# Altium PCB pcb.PcbDoc (part 1 of 2)
Units mm, origin at the board's own origin, x right, y up, seen from the top; angles counter-clockwise.
Board outline 90 x 60 mm, 2 copper layers (Top Layer, Bottom Layer); 136 components, 131 nets, 518 pads, 124 vias.
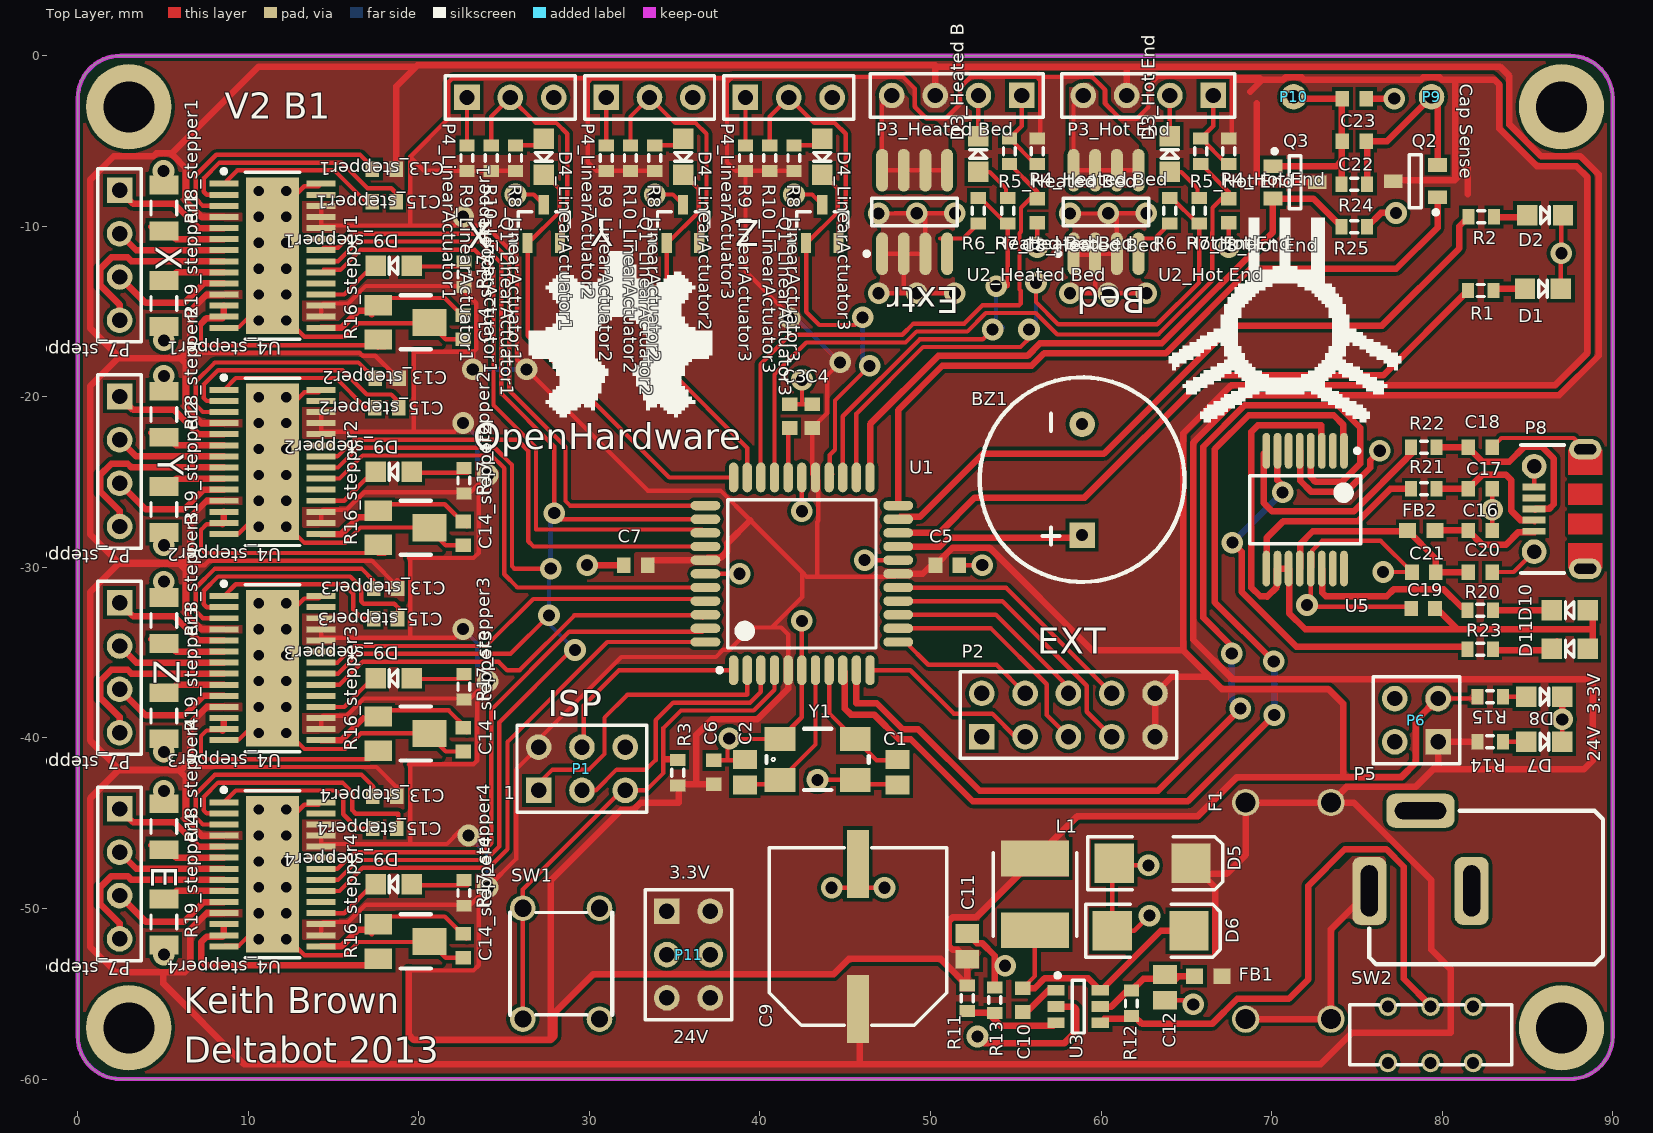
[diagram p0: Top Layer view]
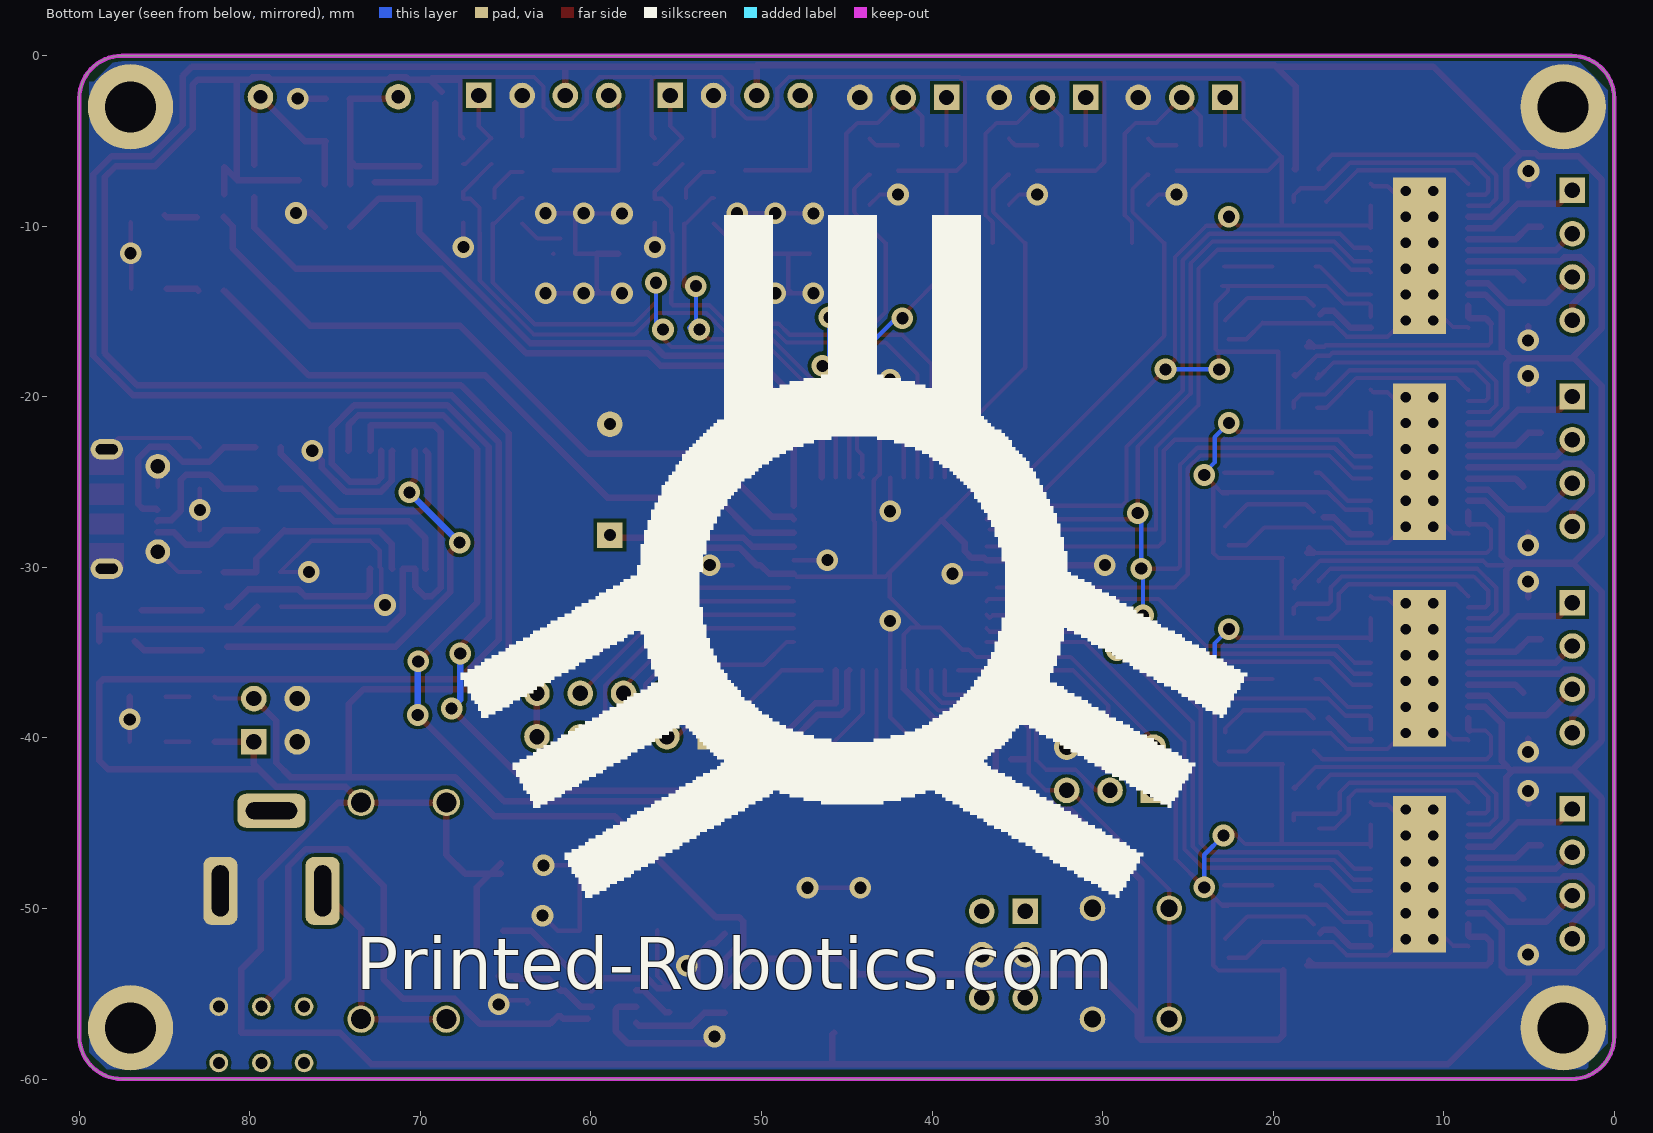
[diagram p1: Bottom Layer view, seen from below]

## Layer stack, top to bottom
Top Layer: signal copper 0.0356
Dielectric: dielectric 0.32, FR-4, Dk 4.8
Bottom Layer: signal copper 0.0356

## Board outline
0,-57.5 0,-2.5 cw(c2.5,-2.5) 2.5,0 87.5,0 cw(c87.5,-2.5) 90,-2.5 90,-57.5 cw(c87.5,-57.5) 87.5,-60 2.5,-60 cw(c2.5,-57.5)

## Design rules (kind name [scope] priority, off if disabled: settings)
Clearance [All] p1: gap=0.203
MinimumSolderMaskSliver [All] p1: minsoldermaskwidth=0
PolygonConnect [All] p1: connectstyle=Direct reliefconductorwidth=0.5 reliefentries=4 polygonreliefangle="90 Angle" airgapwidth=0.254
RoomDefinition "Cap Sense" [InComponentClass('Cap Sense')] p1: confinementstyle=ConfineIn formatcopy=TRUE lockcomponents=FALSE outline 68.275,-15.037 81.483,-15.037 81.483,-0.445 68.275,-0.445
RoomDefinition Power [InComponentClass('Power')] p2: confinementstyle=ConfineIn formatcopy=TRUE lockcomponents=FALSE outline 32.766,-62.23 90.957,-62.23 90.957,-35.763 32.766,-35.763
RoomDefinition USB_Comms [InComponentClass('USB_Comms')] p3: confinementstyle=ConfineIn formatcopy=TRUE lockcomponents=FALSE outline 63.501,-19.439 63.501,-35.738 90.324,-35.738 90.324,-19.439
RoomDefinition stepper4 [InComponentClass('stepper4')] p4: confinementstyle=ConfineIn formatcopy=TRUE lockcomponents=FALSE outline 25.035,-53.939 25.035,-41.849 0.346,-41.849 0.346,-53.939
RoomDefinition stepper3 [InComponentClass('stepper3')] p5: confinementstyle=ConfineIn formatcopy=TRUE lockcomponents=FALSE outline 25.035,-41.849 25.035,-29.759 0.346,-29.759 0.346,-41.849
RoomDefinition stepper2 [InComponentClass('stepper2')] p6: confinementstyle=ConfineIn formatcopy=TRUE lockcomponents=FALSE outline 25.035,-29.759 25.035,-17.668 0.346,-17.668 0.346,-29.759
RoomDefinition stepper1 [InComponentClass('stepper1')] p7: confinementstyle=ConfineIn formatcopy=TRUE lockcomponents=FALSE outline 25.035,-17.668 25.035,-5.578 0.346,-5.578 0.346,-17.668
RoomDefinition LinearActuator3 [InComponentClass('LinearActuator3')] p8: confinementstyle=ConfineIn formatcopy=TRUE lockcomponents=FALSE outline 37.628,-0.922 37.628,-12.497 45.791,-12.497 45.791,-0.922
RoomDefinition LinearActuator2 [InComponentClass('LinearActuator2')] p9: confinementstyle=ConfineIn formatcopy=TRUE lockcomponents=FALSE outline 29.464,-0.922 29.464,-12.497 37.628,-12.497 37.628,-0.922
RoomDefinition LinearActuator1 [InComponentClass('LinearActuator1')] p10: confinementstyle=ConfineIn formatcopy=TRUE lockcomponents=FALSE outline 21.3,-0.922 21.3,-12.497 29.464,-12.497 29.464,-0.922
RoomDefinition "Hot End" [InComponentClass('Hot End')] p11: confinementstyle=ConfineIn formatcopy=TRUE lockcomponents=FALSE outline 57.018,-14.739 68.245,-14.739 68.245,-0.922 57.018,-0.922
RoomDefinition "Heated Bed" [InComponentClass('Heated Bed')] p12: confinementstyle=ConfineIn formatcopy=TRUE lockcomponents=FALSE outline 45.791,-14.739 57.018,-14.739 57.018,-0.922 45.791,-0.922
RoomDefinition CPU [InComponentClass('CPU')] p13: confinementstyle=ConfineIn formatcopy=TRUE lockcomponents=FALSE outline 90,-59.842 90,0 22.595,0 22.595,-59.842
RoutingVias [All] p1: holewidth=0.711 width=1.27 viastyle="Through Hole" minholewidth=0.711 minwidth=1.27 maxholewidth=0.711 maxwidth=1.27
SilkToSilkClearance [All] p1: silktosilkclearance=0
SilkToSolderMaskClearance [IsPad] p1: minsilkscreentomaskgap=0 clearancetoexposedcopper=TRUE
SolderMaskExpansion [All] p1: expansion=0.102
Width [All] p1: maxlimit=1.27 minlimit=0.203 preferedwidth=0.381
25 further rules are at their usual default settings.

## Classes and differential pairs
channel class Stepper_driver: stepper1 stepper2 stepper3 stepper4
channel class Linear_actuator: LinearActuator1 LinearActuator2 LinearActuator3
channel class heater: "Heated Bed" "Hot End"
net class STOP[1..3]: STOP1 STOP2 STOP3
net class STEP[1..3]: STEP1 STEP2 STEP3
net class DIR[1..3]: DIR1 DIR2 DIR3
component class USB_Comms: C16 C17 C18 C19 C20 C21 D10 D11 FB2 P8 R20 R21 R22 R23 U5
component class stepper4: C13_stepper4 C14_stepper4 C15_stepper4 D9_stepper4 P7_stepper4 R16_stepper4 R17_stepper4 R18_stepper4 R19_stepper4 U4_stepper4
component class stepper3: C13_stepper3 C14_stepper3 C15_stepper3 D9_stepper3 P7_stepper3 R16_stepper3 R17_stepper3 R18_stepper3 R19_stepper3 U4_stepper3
component class stepper2: C13_stepper2 C14_stepper2 C15_stepper2 D9_stepper2 P7_stepper2 R16_stepper2 R17_stepper2 R18_stepper2 R19_stepper2 U4_stepper2
component class stepper1: C13_stepper1 C14_stepper1 C15_stepper1 D9_stepper1 P7_stepper1 R16_stepper1 R17_stepper1 R18_stepper1 R19_stepper1 U4_stepper1
component class Power: C9 C10 C11 C12 D5 D6 D7 D8 F1 FB1 L1 P5 P6 P11 R11 R12 R13 R14 R15 SW2 U3
component class LinearActuator3: D4_LinearActuator3 P4_LinearActuator3 Q1_LinearActuator3 R8_LinearActuator3 R9_LinearActuator3 R10_LinearActuator3
component class LinearActuator2: D4_LinearActuator2 P4_LinearActuator2 Q1_LinearActuator2 R8_LinearActuator2 R9_LinearActuator2 R10_LinearActuator2
component class LinearActuator1: D4_LinearActuator1 P4_LinearActuator1 Q1_LinearActuator1 R8_LinearActuator1 R9_LinearActuator1 R10_LinearActuator1
component class "Hot End": "C8_Hot End" "D3_Hot End" "P3_Hot End" "R4_Hot End" "R5_Hot End" "R6_Hot End" "R7_Hot End" "U2_Hot End"
component class "Heated Bed": "C8_Heated Bed" "D3_Heated Bed" "P3_Heated Bed" "R4_Heated Bed" "R5_Heated Bed" "R6_Heated Bed" "R7_Heated Bed" "U2_Heated Bed"
component class CPU: BZ1 C1 C2 C3 C4 C5 C6 C7 D1 D2 P1 P2 R1 R2 SW1 U1 Y1
component class "Cap Sense": C22 C23 P9 P10 Q2 Q3 R24 R25

## Components (designator, comment, footprint, x,y, rotation, side; value= is the part's Value field where it differs from the comment)
BZ1 "Buzzer" buzzer 58.903,-24.867 r90 top
C1 "Cap" CAPC2012L-3D 48.057,-42.012 r90 top
C2 "Cap" CAPC2012L-3D 39.116,-42.012 r270 top
C3 "Cap" 1608[0603] 41.746,-21.133 r270 top
C4 "Cap" 1608[0603] 43.067,-21.133 r90 top
C5 "Cap" 1608[0603] 50.992,-29.87 r0 top
C6 "Cap" 1608[0603] 37.287,-42.012 r90 top
C7 "Cap" 1608[0603] 32.715,-29.87 r180 top
"C8_Heated Bed" "Cap" 1608[0603] 56.256,-9.089 r270 top (schematic designator C8)
"C8_Hot End" "Cap" 1608[0603] 67.483,-9.089 r270 top (schematic designator C8)
C9 "Cap Pol" "Capacitor Nichi CL 10x10" 45.745,-51.638 r270 top
C10 "Cap" 1608[0603] 55.412,-55.375 r90 top
C11 "Cap" CAPC2012L-3D 52.161,-52.222 r270 top
C12 "Cap" CAPC2012L-3D 63.743,-54.626 r90 top
C13_stepper1 "Cap" 1608[0603] 17.973,-6.649 r0 top (schematic designator C13)
C13_stepper2 "Cap" 1608[0603] 18.151,-18.917 r0 top (schematic designator C13)
C13_stepper3 "Cap" 1608[0603] 18.049,-31.236 r0 top (schematic designator C13)
C13_stepper4 "Cap" 1608[0603] 17.999,-43.428 r0 top (schematic designator C13)
C14_stepper1 "Cap" 1608[0603] 22.597,-15.92 r270 top (schematic designator C14)
C14_stepper2 "Cap" 1608[0603] 22.597,-28.01 r270 top (schematic designator C14)
C14_stepper3 "Cap" 1608[0603] 22.597,-40.101 r270 top (schematic designator C14)
C14_stepper4 "Cap" 1608[0603] 22.597,-52.191 r270 top (schematic designator C14)
C15_stepper1 "Cap" 1608[0603] 17.973,-8.554 r180 top (schematic designator C15)
C15_stepper2 "Cap" 1608[0603] 18.126,-20.644 r180 top (schematic designator C15)
C15_stepper3 "Cap" 1608[0603] 18.049,-33.014 r180 top (schematic designator C15)
C15_stepper4 "Cap" 1608[0603] 17.999,-45.308 r180 top (schematic designator C15)
C16 "Cap" 1608[0603] 82.234,-27.838 r180 top
C17 "Cap" 1608[0603] 82.234,-25.4 r180 top
C18 "Cap" 1608[0603] 82.234,-22.962 r180 top
C19 "Cap" 1608[0603] 78.881,-32.41 r0 top
C20 "Cap" 1608[0603] 82.234,-30.277 r180 top
C21 "Cap" 1608[0603] 78.931,-30.277 r0 top
C22 "Cap" 1608[0603] 74.854,-5.021 r180 top
C23 "Cap" 1608[0603] 74.854,-2.515 r0 top
D1 "LED3" "LED 0805" 84.861,-13.665 r0 top
D2 "LED3" "LED 0805" 84.988,-9.347 r0 top
"D3_Heated Bed" "LED3" "LED 0805" 52.802,-6.815 r90 top (schematic designator D3)
"D3_Hot End" "LED3" "LED 0805" 64.028,-6.815 r90 top (schematic designator D3)
D4_LinearActuator1 "LED2" "LED 0805" 27.33,-4.877 r270 top (schematic designator D4)
D4_LinearActuator2 "LED2" "LED 0805" 35.494,-4.877 r270 top (schematic designator D4)
D4_LinearActuator3 "LED2" "LED 0805" 43.658,-4.877 r270 top (schematic designator D4)
D5 "D Schottky" DO-214-AA 63.032,-47.346 r0 top
D6 "D Schottky" DO-214-AA 62.903,-51.308 r0 top
D7 "LED2" "LED 0805" 84.947,-40.234 r0 top
D8 "LED2" "LED 0805" 84.947,-37.592 r0 top
D9_stepper1 "LED2" "LED 0805" 19.576,-12.313 r180 top (schematic designator D9)
D9_stepper2 "LED2" "LED 0805" 19.576,-24.403 r180 top (schematic designator D9)
D9_stepper3 "LED2" "LED 0805" 19.576,-36.494 r180 top (schematic designator D9)
D9_stepper4 "LED2" "LED 0805" 19.576,-48.584 r180 top (schematic designator D9)
D10 "LED3" "LED 0805" 88.533,-32.512 r180 top
D11 "LED3" "LED 0805" 88.533,-34.781 r180 top
F1 "Fuse" "Fuse Holder" 73.482,-56.49 r90 top
FB1 "Ferrite Bead" 0603 66.294,-53.975 r0 top
FB2 "Ferrite Bead" 0603 78.78,-27.838 r0 top
L1 "Inductor" "Inductor 5020" 56.123,-49.174 r90 top
P1 "Header 3X2" HDR2X3 27.026,-43.078 r0 top
P2 "Header 5X2" HDR2X5 53.01,-39.929 r0 top
"P3_Heated Bed" "Header 4" HDR1X4 55.353,-2.33 r180 top (schematic designator P3)
"P3_Hot End" "Header 4" HDR1X4 66.58,-2.33 r180 top (schematic designator P3)
P4_LinearActuator1 "Header 3" HDR1X3 22.824,-2.446 r0 top (schematic designator P4)
P4_LinearActuator2 "Header 3" HDR1X3 30.988,-2.446 r0 top (schematic designator P4)
P4_LinearActuator3 "Header 3" HDR1X3 39.152,-2.446 r0 top (schematic designator P4)
P5 "power_jack" PowerJack 89.433,-48.971 r0 top
P6 "Header 2X2" HDR2X2 79.765,-40.234 r90 top
P7_stepper1 "Header 4" HDR1X4 2.455,-7.893 r270 top (schematic designator P7)
P7_stepper2 "Header 4" HDR1X4 2.455,-19.984 r270 top (schematic designator P7)
P7_stepper3 "Header 4" HDR1X4 2.455,-32.074 r270 top (schematic designator P7)
P7_stepper4 "Header 4" HDR1X4 2.455,-44.165 r270 top (schematic designator P7)
P8 "USB Micro B" "USB micro B" 85.396,-29.08 r90 top
P9 "Testpoint" Testpoint 79.381,-2.413 r0 top
P10 "Testpoint" Testpoint 71.298,-2.413 r0 top
P11 "Header 3X2" HDR2X3 34.544,-50.165 r270 top
Q1_LinearActuator1 "QNPN" SOT-23B_N 27.33,-9.855 r90 top (schematic designator Q1)
Q1_LinearActuator2 "QNPN" SOT-23B_N 35.494,-9.855 r90 top (schematic designator Q1)
Q1_LinearActuator3 "QNPN" SOT-23B_N 43.658,-9.855 r90 top (schematic designator Q1)
Q2 "MOSFET-N" SOT23 79.731,-8.306 r180 top
Q3 "MOSFET-N" SOT23 70.079,-6.476 r0 top
R1 "Res" J1-0603 82.271,-13.767 r180 top
R2 "Res" J1-0603 82.296,-9.449 r180 top
R3 "Res" J1-0603 35.179,-42.037 r270 top
"R4_Heated Bed" "Res" J1-0603 56.256,-5.595 r90 top (schematic designator R4)
"R4_Hot End" "Res" J1-0603 67.483,-5.595 r90 top (schematic designator R4)
"R5_Heated Bed" "Res" J1-0603 54.63,-5.595 r90 top (schematic designator R5)
"R5_Hot End" "Res" J1-0603 65.857,-5.595 r90 top (schematic designator R5)
"R6_Heated Bed" "Res" J1-0603 52.802,-9.089 r90 top (schematic designator R6)
"R6_Hot End" "Res" J1-0603 64.028,-9.089 r90 top (schematic designator R6)
"R7_Heated Bed" "Res" J1-0603 54.529,-9.089 r270 top (schematic designator R7)
"R7_Hot End" "Res" J1-0603 65.756,-9.089 r270 top (schematic designator R7)
R8_LinearActuator1 "Res" J1-0603 25.669,-6.002 r270 top (schematic designator R8)
R8_LinearActuator2 "Res" J1-0603 33.833,-6.002 r270 top (schematic designator R8)
R8_LinearActuator3 "Res" J1-0603 41.996,-6.002 r270 top (schematic designator R8)
R9_LinearActuator1 "Res" J1-0603 22.824,-6.002 r270 top (schematic designator R9)
R9_LinearActuator2 "Res" J1-0603 30.988,-6.002 r270 top (schematic designator R9)
R9_LinearActuator3 "Res" J1-0603 39.152,-6.002 r270 top (schematic designator R9)
R10_LinearActuator1 "Res" J1-0603 24.247,-6.002 r270 top (schematic designator R10)
R10_LinearActuator2 "Res" J1-0603 32.41,-6.002 r270 top (schematic designator R10)
R10_LinearActuator3 "Res" J1-0603 40.574,-6.002 r270 top (schematic designator R10)
R11 "Res" J1-0603 52.161,-55.27 r90 top
R12 "Res" J1-0603 61.785,-55.566 r90 top
R13 "Res" J1-0603 53.768,-55.375 r270 top
R14 "Res" J1-0603 82.813,-40.234 r180 top
R15 "Res" J1-0603 82.813,-37.592 r180 top
R16_stepper1 "RES_POT" RES_SMD 18.025,-15.64 r270 top (schematic designator R16)
R16_stepper2 "RES_POT" RES_SMD 18.025,-27.68 r270 top (schematic designator R16)
R16_stepper3 "RES_POT" RES_SMD 18.025,-39.745 r270 top (schematic designator R16)
R16_stepper4 "RES_POT" RES_SMD 18.025,-51.937 r270 top (schematic designator R16)
R17_stepper1 "Res" J1-0603 22.648,-12.821 r270 top (schematic designator R17)
R17_stepper2 "Res" J1-0603 22.648,-24.911 r270 top (schematic designator R17)
R17_stepper3 "Res" J1-0603 22.648,-37.002 r270 top (schematic designator R17)
R17_stepper4 "Res" J1-0603 22.648,-49.092 r270 top (schematic designator R17)
R18_stepper1 "Res" C1206 5.045,-8.935 r270 top (schematic designator R18)
R18_stepper2 "Res" C1206 5.045,-21.025 r270 top (schematic designator R18)
R18_stepper3 "Res" C1206 5.045,-33.116 r270 top (schematic designator R18)
R18_stepper4 "Res" C1206 5.045,-45.206 r270 top (schematic designator R18)
R19_stepper1 "Res" C1206 5.045,-14.523 r90 top (schematic designator R19)
R19_stepper2 "Res" C1206 5.045,-26.613 r90 top (schematic designator R19)
R19_stepper3 "Res" C1206 5.045,-38.704 r90 top (schematic designator R19)
R19_stepper4 "Res" C1206 5.045,-50.794 r90 top (schematic designator R19)
R20 "Res" J1-0603 82.234,-32.512 r180 top
R21 "Res" J1-0603 78.931,-25.4 r0 top
R22 "Res" J1-0603 78.931,-22.962 r0 top
R23 "Res" J1-0603 82.234,-34.806 r180 top
R24 "Res" J1-0603 74.854,-7.527 r0 top
R25 "Res" J1-0603 74.854,-10.033 r180 top
SW1 "Tactile Switch 6mm" "Switch 6mm" 28.346,-53.238 r270 top
SW2 "DPDT" MCLSS22 79.324,-57.404 r0 top
U1 "ATmega644PA-AU" 44A_N 42.458,-30.378 r90 top
"U2_Heated Bed" "irf8714pbf" SO-8_M 49.068,-9.163 r90 top (schematic designator U2)
"U2_Hot End" "irf8714pbf" SO-8_M 60.295,-9.163 r90 top (schematic designator U2)
U3 "AOZ1280" SOT23-6 57.357,-54.803 r0 top
U4_stepper1 "DRV8825" DVR 11.421,-11.729 r0 top (schematic designator U4)
U4_stepper2 "DRV8825" DVR 11.421,-23.819 r0 top (schematic designator U4)
U4_stepper3 "DRV8825" DVR 11.421,-35.91 r0 top (schematic designator U4)
U4_stepper4 "DRV8825" DVR 11.421,-48 r0 top (schematic designator U4)
U5 "FT230XS" SSOP16_N 71.972,-26.619 r270 top
Y1 "ABMM2" ABMM2 43.383,-41.261 r0 top

## Footprints (in the part's own frame and the unit in brackets; to place one, negate y for a bottom-side part, rotate by r counter-clockwise, add the part's x,y. Pads: shape width x height; smd on the part's side, far side on the other; paste and mask are expansions set on the pad)
44A_N [mm] "Thin QFP, 44-Leads, Body 10x10mm, Pitch 0.8mm, IPC Medium Density"
  oval 1.75x0.55 smd: 1(-5.65,4) 2(-5.65,3.2) 3(-5.65,2.4) 4(-5.65,1.6) 5(-5.65,0.8) 6(-5.65,0) 7(-5.65,-0.8) 8(-5.65,-1.6) 9(-5.65,-2.4) 10(-5.65,-3.2) 11(-5.65,-4) 23(5.65,-4) 24(5.65,-3.2) 25(5.65,-2.4) 26(5.65,-1.6) 27(5.65,-0.8) 28(5.65,0) 29(5.65,0.8) 30(5.65,1.6) 31(5.65,2.4) 32(5.65,3.2) 33(5.65,4)
  oval 0.55x1.75 smd: 12(-4,-5.65) 13(-3.2,-5.65) 14(-2.4,-5.65) 15(-1.6,-5.65) 16(-0.8,-5.65) 17(0,-5.65) 18(0.8,-5.65) 19(1.6,-5.65) 20(2.4,-5.65) 21(3.2,-5.65) 22(4,-5.65) 34(4,5.65) 35(3.2,5.65) 36(2.4,5.65) 37(1.6,5.65) 38(0.8,5.65) 39(0,5.65) 40(-0.8,5.65) 41(-1.6,5.65) 42(-2.4,5.65) 43(-3.2,5.65) 44(-4,5.65)
  silkscreen extent -5.77,-4.35 4.35,4.95, body extent -5,-5 5,5, height 1.2
0603 [mm]
  rect 1x0.9 smd: 1(-0.8,0) 2(0.8,0)
  body extent -0.87,-0.48 0.87,0.48, height 1.3
1608[0603] [mm] "Chip Capacitor, Body 1.6x0.8mm, IPC High Density"
  rect 0.8x0.9 smd: 1(-0.7,0) 2(0.7,0)
  body extent -0.87,-0.48 0.87,0.48, height 1.3
ABMM2 [mm]
  rect 1.8x1.4 smd: 1(-2.2,-1.2) 2(2.2,-1.2) 3(2.2,1.2) 4(-2.2,1.2)
  silkscreen extent -3,-1.8 3,1.8
buzzer [mm]
  rect 1.5x1.5 hole 0.7: 1(-3.24,0.01)
  round 1.5 hole 0.7: 2(3.26,0.01)
  silkscreen extent -5.99,-5.99 6.01,6.01, body extent -6,-6 6.02,6.02
C1206 [mm] "Chip Capacitor, Body 3.2x1.6mm, IPC High Density"
  rect 1.1x1.7 smd: 1(-1.35,0) 2(1.35,0)
  silkscreen extent -0.4,-0.75 0.4,0.75, body extent -1.7,-0.9 1.7,0.9, height 1.3
"Capacitor Nichi CL 10x10" [mm]
  rect 4x1.3 smd: 1(-4.25,0) 2(4.25,0)
  silkscreen extent -5.2,-5.2 5.2,5.2
CAPC2012L-3D [mm] "Chip Capacitor, Body 2.0x1.3mm, IPC High Density"
  rect 1.1x1.4 smd: 1(-0.75,0) 2(0.75,0)
  body extent -1,-0.63 1,0.62, height 0.78
DO-214-AA [mm] "DO-214-AA/SMB; 2 C-Bend Leads; Body 5.3 x 3.6 mm, inc. leads (LxW)"
  rect 2.3x2.3 smd: 1(-2.25,0) 2(2.25,0)
  silkscreen extent -3.8,-1.55 4.1,1.55, body extent -2.7,-1.8 2.7,1.8, height 2.3
DVR [mm]
  rect 1.7x0.35 smd: 1(-2.85,4.225) 2(-2.85,3.575) 3(-2.85,2.925) 4(-2.85,2.275) 5(-2.85,1.625) 6(-2.85,0.975) 7(-2.85,0.325) 8(-2.85,-0.325) 9(-2.85,-0.975) 10(-2.85,-1.625) 11(-2.85,-2.275) 12(-2.85,-2.925) 13(-2.85,-3.575) 14(-2.85,-4.225) 15(2.85,-4.225) 16(2.85,-3.575) 17(2.85,-2.925) 18(2.85,-2.275) 19(2.85,-1.625) 20(2.85,-0.975) 21(2.85,-0.325) 22(2.85,0.325) 23(2.85,0.975) 24(2.85,1.625) 25(2.85,2.275) 26(2.85,2.925) 27(2.85,3.575) 28(2.85,4.225)
  rect 3.1x9.18 smd: 29(0,0)
  rect 3.1x9.18 smd far side: 29(0,0)
  silkscreen extent -2.97,-4.9 1.6,5.07, body extent -2.25,-4.9 2.25,4.9, height 1.2
"Fuse Holder" [mm]
  round 1.6 hole 1.17 mask+0.06: 1(0,5) 1(0,0) 2(12.7,0) 2(12.7,5)
  body extent -2.28,0 15.13,5.1, height 7.4
HDR1X3 [mm] "Connector; Header; 3 Position"
  rect 1.5x1.5 hole 0.9: 1(0,0)
  round 1.5 hole 0.9: 2(2.54,0) 3(5.08,0)
  silkscreen extent -1.27,-1.27 6.35,1.27
HDR1X4 [mm] "Connector; Header; 4 Position"
  rect 1.5x1.5 hole 0.9: 1(0,0)
  round 1.5 hole 0.9: 2(2.54,0) 3(5.08,0) 4(7.62,0)
  silkscreen extent -1.27,-1.27 8.89,1.27
HDR2X2 [mm] "Connector; Header; 2x2 Position"
  rect 1.5x1.5 hole 0.9: 1(0,0)
  round 1.5 hole 0.9: 2(0,2.54) 3(2.54,0) 4(2.54,2.54)
  silkscreen extent -1.27,-1.27 3.81,3.81
HDR2X3 [mm] "Connector; Header; 3x2 Position"
  rect 1.5x1.5 hole 0.9: 1(0,0)
  round 1.5 hole 0.9: 2(0,2.54) 3(2.54,0) 4(2.54,2.54) 5(5.08,0) 6(5.08,2.54)
  silkscreen extent -1.27,-1.27 6.35,3.81
HDR2X5 [mm] "Connector; Header; 5x2 Position"
  rect 1.5x1.5 hole 0.9: 1(0,0)
  round 1.5 hole 0.9: 2(0,2.54) 3(2.54,0) 4(2.54,2.54) 5(5.08,0) 6(5.08,2.54) 7(7.62,0) 8(7.62,2.54) 9(10.16,0) 10(10.16,2.54)
  silkscreen extent -1.27,-1.27 11.43,3.81
"Inductor 5020" [mm]
  rect 2.1x4 smd: 1(-2.1,0) 2(2.1,0)
  silkscreen extent -2.45,-2.45 2.45,2.45
J1-0603 [mm] "Chip Resistor, Body 1.6x0.8mm, IPC High Density"
  rect 0.7x0.9 smd: 1(-0.75,0) 2(0.75,0)
  silkscreen extent -0.2,-0.35 0.2,0.35, body extent -0.85,-0.48 0.85,0.48, height 0.9
"LED 0805" [mm]
  rect 1.2x1.2 smd: 1(0,0) 2(2.1,0)
  silkscreen extent 0.8,-0.5 1.3,0.5
MCLSS22 [mm] "DPDT small"
  round 1.1 hole 0.7 mask+0.06: 1(-2.5,-1.65) 2(0,-1.65) 3(2.5,-1.65) 4(-2.5,1.65) 5(0,1.65) 6(2.5,1.65)
  silkscreen extent -4.75,-1.75 4.75,1.75
PowerJack [mm]
  rrect50% 2x4 hole 1 slot 3 at 90 deg: 1(-13.7,0) 2(-7.7,0)
  rrect50% 4x2 hole 1 slot 3 at 0 deg: 3(-10.7,4.7)
  silkscreen extent -13.7,-4.3 0,4.7
RES_SMD [mm]
  rect 1.6x2 smd: 1(0,2.6)
  rect 1.2x1.6 smd: 2(-1,-0.4) 3(1,-0.4)
  silkscreen extent -1.59,0.92 1.58,2.67
SO-8_M [mm] "8-Pin Plastic Small Outline Integrated Circuit 1.27 mm Pitch, IPC Low Density"
  oval 2.5x0.7 smd: 1(-2.45,1.905) 2(-2.45,0.635) 3(-2.45,-0.635) 4(-2.45,-1.905) 5(2.45,-1.905) 6(2.45,-0.635) 7(2.45,0.635) 8(2.45,1.905)
  silkscreen extent -2.57,-2.5 0.8,2.93, body extent -2,-2.5 2,2.5, height 1.75
SOT23 [mm]
  rect 1.1x0.8 smd: 1(0,0) 2(0,-1.9) 3(2.6,-0.95)
  silkscreen extent -0.03,-2.5 1.65,1, body extent 0.4,-2.5 2.2,0.6, height 1.19
SOT23-6 [mm] "SOT23, 6-Leads, Body 2.9x1.6mm, Pitch 0.95mm, Lead Span 2.8mm, Ample"
  rect 1x0.63 smd mask+0.07: 1(0,0) 2(0,-0.95) 3(0,-1.9) 4(2.6,-1.9) 5(2.6,-0.95) 6(2.6,0)
  silkscreen extent -0.02,-2.5 1.65,1, body extent 0.4,-2.5 2.2,0.6, height 1.19
SOT-23B_N [mm] "SOT23, 3-Leads, Body 2.9x1.3mm, Pitch 0.95mm, Lead Span 2.4mm, IPC Medium Density"
  rect 1.15x0.6 smd: 1(-1.125,0.95) 2(-1.125,-0.95) 3(1.125,0)
  silkscreen extent -1.25,-1.5 0.7,1.92, body extent -0.7,-1.5 0.7,1.5, height 1.14
SSOP16_N [mm] "SOP, 16-Leads, Body 6.2x5.3mm, Pitch 0.65mm, IPC Medium Density"
  oval 2.1x0.45 smd: 1(-3.45,2.275) 2(-3.45,1.625) 3(-3.45,0.975) 4(-3.45,0.325) 5(-3.45,-0.325) 6(-3.45,-0.975) 7(-3.45,-1.625) 8(-3.45,-2.275) 9(3.45,-2.275) 10(3.45,-1.625) 11(3.45,-0.975) 12(3.45,-0.325) 13(3.45,0.325) 14(3.45,0.975) 15(3.45,1.625) 16(3.45,2.275)
  silkscreen extent -3.57,-3.25 2,3.25, body extent -2.7,-3.25 2.7,3.25, height 2
"Switch 6mm" [mm] "Switch 6mm, TH"
  round 1.5 hole 1 paste+0: 1(-3.25,2.25) 1(3.25,2.25) 2(-3.25,-2.25) 2(3.25,-2.25)
  silkscreen extent -3,-3 3,3, body extent -3.85,-3 3.85,3, height 5
Testpoint [mm]
  round 1.5 hole 0.8 paste+0: 1(0,0)
"USB micro B" [mm]
  rect 0.4x1.35 smd: 1(1.2,0) 2(1.85,0) 3(2.5,0) 4(3.15,0) 5(3.8,0)
  oval 1.2x1.9 hole 0.6 slot 1.3 at 90 deg: 6(-1,-3) 6(6,-3)
  round 1.45 hole 0.85: 6(0,0) 6(5,0)
  Top Layer region: -1,-4 0.5,-4 0.5,-2 -1,-2
  Top Layer region: 4.5,-4 6,-4 6,-2 4.5,-2
  Top Layer region: 1,-4 2.25,-4 2.25,-2 1,-2
  Top Layer region: 2.75,-4 4,-4 4,-2 2.75,-2
  Keep-Out Layer lines w0.1: -1,-4.7 6,-4.7
  silkscreen extent -1.25,-1.75 6.25,0.75

## Part data
C1 C2 C3 C4 C5 C6 C7 "C8_Heated Bed" "C8_Hot End" C10 C11 C12 C13_stepper1 C13_stepper2 C13_stepper3 C13_stepper4 C14_stepper1 C14_stepper2 C14_stepper3 C14_stepper4 C15_stepper1 C15_stepper2 C15_stepper3 C15_stepper4 C16 C17 C18 C19 C20 C21 C22 C23: "Capacitor"
C9: "Polarized Capacitor (Axial)"
D1 D2 "D3_Heated Bed" "D3_Hot End" D10 D11: "Typical BLUE SiC LED"
D4_LinearActuator1 D4_LinearActuator2 D4_LinearActuator3 D7 D8 D9_stepper1 D9_stepper2 D9_stepper3 D9_stepper4: "Typical RED, GREEN, YELLOW, AMBER GaAs LED"
D5 D6: "Schottky Diode"
P1 P11: "Header, 3-Pin, Dual row"
P2: "Header, 5-Pin, Dual row"
"P3_Heated Bed" "P3_Hot End" P7_stepper1 P7_stepper2 P7_stepper3 P7_stepper4: "Header, 4-Pin"
P4_LinearActuator1 P4_LinearActuator2 P4_LinearActuator3: "Header, 3-Pin"
P6: "Header, 2-Pin, Dual row"
Q1_LinearActuator1 Q1_LinearActuator2 Q1_LinearActuator3: "NPN Bipolar Transistor"
Q2 Q3: "N-Channel MOSFET"
R1 R2 R3 "R4_Heated Bed" "R4_Hot End" "R5_Heated Bed" "R5_Hot End" "R6_Heated Bed" "R6_Hot End" "R7_Heated Bed" "R7_Hot End" R8_LinearActuator1 R8_LinearActuator2 R8_LinearActuator3 R9_LinearActuator1 R9_LinearActuator2 R9_LinearActuator3 R10_LinearActuator1 R10_LinearActuator2 R10_LinearActuator3 R11 R12 R13 R14 R15 R17_stepper1 R17_stepper2 R17_stepper3 R17_stepper4 R18_stepper1 R18_stepper2 R18_stepper3 R18_stepper4 R19_stepper1 R19_stepper2 R19_stepper3 R19_stepper4 R20 R21 R22 R23 R24 R25: "Resistor 0805"
SW2: "Switch"
U1: "8-bit AVR Microcontroller, 64KB Flash, 2KB EEPROM, 4KB SRAM, 44-pin TQFP, Industrial Grade (-40°C to 85°C)"

## Free pads (board coordinates)
  round 5 hole 3: ""(3,-57) ""(3,-3) ""(87,-57) ""(87,-3)

## Via types
v1: diameter 1.27, hole 0.711, Top Layer to Bottom Layer, 76 vias
v2: diameter 1, hole 0.6, Top Layer to Bottom Layer, tented top, 48 vias

## Nets (pads, with @x,y where several pads share a name; then routed paths per layer and width w, separated by ;. In a path a pad name is that pad's centre, name@x,y a point inside that pad or via, vN(x,y) a via of type N, cw(c..) or ccw(c..) an arc to the next point about the centre after c; other vN are vias at no path point)
3.3V: C19.2 D10.1 D11.1 U5.3 U5.10 U5.11 | length 42.8
  Top Layer w0.381: U5.3@72.947,-23.169 72.916,-23.138 72.916,-21.67 72.912,-21.666 69.204,-21.666 68.823,-22.047 68.823,-31.191 69.331,-31.699 69.737,-31.699 69.752,-31.714 70.316,-31.15 70.316,-30.101 U5.10@70.347,-30.069 U5.11@70.997,-30.069 71.029,-30.101 71.029,-32.686 71.972,-33.63 80.902,-33.63 ; C19.2@79.581,-32.309 80.902,-33.63 ; D11.1@88.838,-34.341 88.838,-33.63 ; D10.1@88.838,-32.817 88.838,-33.63 ; 80.902,-33.63 88.838,-33.63
+3.3V: "R4_Heated Bed.2" "R4_Hot End.2" C4.1 C5.1 C6.1 C7.1 C11.2 L1.2 P1.2 P2.9 P2.10 P6.3 P11.1 P11.2 Q2.3 Q3.3 R3.2 R8_LinearActuator1.2 R8_LinearActuator2.2 R8_LinearActuator3.2 R9_LinearActuator1.2 R9_LinearActuator2.2 R9_LinearActuator3.2 R10_LinearActuator1.2 R10_LinearActuator2.2 R10_LinearActuator3.2 R11.2 R15.2 R17_stepper1.2 R17_stepper2.2 R17_stepper3.2 R17_stepper4.2 U1.5 U1.17 U1.27 U1.38 U4_stepper1.16 U4_stepper1.17 U4_stepper1.24 U4_stepper1.25 U4_stepper1.26 U4_stepper2.16 U4_stepper2.17 U4_stepper2.24 U4_stepper2.25 U4_stepper2.26 U4_stepper3.16 U4_stepper3.17 U4_stepper3.24 U4_stepper3.25 U4_stepper3.26 U4_stepper4.16 U4_stepper4.17 U4_stepper4.24 U4_stepper4.25 U4_stepper4.26 | length 598.2
  Top Layer w0.254: U4_stepper4.16@14.271,-51.575 U4_stepper4.17@14.271,-50.925 14.4,-50.796 15.864,-50.796 16.882,-49.778 R17_stepper4.2@22.99,-49.778 ; U4_stepper4.26@14.271,-45.075 U4_stepper4.25@14.271,-45.725 U4_stepper4.24@14.271,-46.375 14.424,-46.222 19.498,-46.222 ; U4_stepper3.16@14.271,-39.485 U4_stepper3.17@14.271,-38.835 14.4,-38.705 15.752,-38.705 16.77,-37.688 R17_stepper3.2@22.99,-37.688 ; U4_stepper3.26@14.271,-32.985 U4_stepper3.25@14.271,-33.635 U4_stepper3.24@14.271,-34.285 14.424,-34.132 19.498,-34.132 ; U4_stepper2.16@14.271,-27.394 U4_stepper2.17@14.271,-26.744 14.4,-26.615 15.778,-26.615 16.795,-25.597 R17_stepper2.2@22.99,-25.597 ; U4_stepper2.26@14.271,-20.894 U4_stepper2.25@14.271,-21.544 U4_stepper2.24@14.271,-22.194 14.424,-22.041 19.71,-22.041 ; U4_stepper1.16@14.271,-15.304 U4_stepper1.17@14.271,-14.654 14.4,-14.524 15.864,-14.524 16.882,-13.507 R17_stepper1.2@22.99,-13.507 ; U4_stepper1.26@14.271,-8.804 U4_stepper1.25@14.271,-9.454 U4_stepper1.24@14.271,-10.104 14.424,-9.951 19.498,-9.951 ; 19.422,-53.635 23.211,-53.635 23.511,-53.334 23.511,-49.295 ; v1(22.597,-33.624) 22.089,-34.132 19.498,-34.132 ; v1(22.597,-21.533) 22.089,-22.041 19.71,-22.041 ; R17_stepper4.2@22.648,-49.842 22.964,-49.842 23.511,-49.295 ; R17_stepper3.2@22.648,-37.752 22.964,-37.752 23.419,-37.297 ; R17_stepper2.2@22.648,-25.661 22.964,-25.661 23.511,-25.115 ; R17_stepper1.2@22.648,-13.571 22.648,-13.787 23.377,-14.517 23.377,-17.197 23.211,-17.363 ; v1@23.038,-45.923 23.038,-45.847 v1(22.911,-45.72) 22.911,-45.669 22.708,-45.466 22.403,-45.466 21.647,-46.222 19.498,-46.222 ; v1(23.165,-18.39) 23.211,-18.344 23.211,-17.363 ; v1(24.045,-36.672) 23.419,-37.297 ; v1(24.045,-24.581) 23.511,-25.115 ; R8_LinearActuator1.2@25.669,-6.752 R10_LinearActuator1.2@24.247,-6.752 R9_LinearActuator1.2@22.824,-6.752 20.316,-6.752 19.498,-5.933 ; C7.1@33.415,-29.87 C7.1@33.707,-29.578 ; R8_LinearActuator2.2@33.833,-6.752 R10_LinearActuator2.2@32.41,-6.752 R9_LinearActuator2.2@30.988,-6.752 30.417,-6.752 29.908,-6.242 29.908,-1.559 30.154,-1.312 ; U1.5@41.658,-36.028 41.658,-33.936 41.25,-33.528 40.691,-33.528 ; v1(41.742,-15.392) 41.742,-15.225 39.152,-12.634 R9_LinearActuator3.2@39.152,-6.752 ; R8_LinearActuator3.2@41.996,-6.752 R10_LinearActuator3.2@40.574,-6.752 R9_LinearActuator3.2@39.152,-6.752 ; v1(44.704,-17.983) 43.942,-18.745 43.942,-20.958 C4.1@43.067,-21.833 43.067,-24.538 U1.27@43.258,-24.728 43.423,-24.894 43.423,-27.275 43.358,-27.34 43.358,-30.518 43.332,-30.544 ; U1.17@48.108,-30.378 47.942,-30.544 43.332,-30.544 ; 56.256,-4.845 56.433,-4.668 56.433,-1.443 56.337,-1.347 ; 67.483,-4.845 67.66,-4.668 67.66,-1.443 ; 69.342,-1.25 63.342,-1.25 62.789,-1.803 62.789,-3.013 62.093,-3.708 61.138,-3.708 60.249,-2.819 60.249,-2.015 59.483,-1.25 56.433,-1.25 56.337,-1.347 ; P6.3@79.765,-37.694 81.962,-37.694 R15.2@82.063,-37.592 ; 19.498,-46.222 19.498,-41.62 19.422,-41.544 23.211,-41.544 23.419,-41.336 23.419,-37.297 ; 19.498,-34.132 19.498,-29.53 19.422,-29.454 23.211,-29.454 23.511,-29.153 23.511,-25.115 ; 19.498,-9.951 22.089,-9.951 v1(22.597,-9.443) 23.13,-9.976 23.932,-9.976 25.756,-11.799 25.756,-17.831 v1(26.314,-18.39) 33.426,-25.502 37.694,-25.502 39.433,-27.241 42.481,-30.29 ; 19.498,-9.951 19.498,-5.933 ; 19.498,-5.933 21.744,-3.687 21.744,-1.559 21.991,-1.312 30.154,-1.312 ; 19.71,-22.041 19.71,-17.363 23.211,-17.363 ; 23.511,-49.295 v1(24.045,-48.762) 25.705,-47.102 25.705,-41.859 P1.2@27.026,-40.538 27.026,-40.095 31.865,-35.255 37.42,-35.255 37.852,-34.823 38.227,-34.823 39.522,-33.528 40.691,-33.528 ; 30.154,-1.312 38.318,-1.312 ; 38.318,-1.312 38.381,-1.25 48.392,-1.25 49.073,-1.93 49.073,-2.997 49.759,-3.683 50.892,-3.683 51.733,-2.842 51.733,-1.883 52.366,-1.25 56.24,-1.25 56.337,-1.347 ; 38.318,-1.312 38.071,-1.559 38.071,-6.242 38.581,-6.752 R9_LinearActuator3.2@39.152,-6.752 ; 40.691,-33.528 42.481,-31.737 42.481,-30.29 ; 42.481,-30.29 42.736,-30.544 43.332,-30.544
  Top Layer w0.381: 19.422,-53.635 19.422,-57.42 19.71,-57.709 27.737,-57.709 27.94,-57.506 27.94,-56.134 30.226,-53.848 34.07,-53.848 ; 27.737,-57.531 27.737,-48.362 31.876,-44.222 32.579,-44.222 33.012,-43.79 35.255,-43.79 35.255,-42.864 35.407,-42.712 36.271,-42.712 ; C7.1@33.707,-29.578 U1.38@36.808,-29.578 36.939,-29.447 37.685,-29.447 38.076,-29.055 38.076,-28.599 39.433,-27.241 ; 34.07,-53.849 35.018,-53.849 ; 35.018,-53.848 36.61,-53.848 ; 36.61,-53.849 44.322,-53.849 45.212,-52.959 50.6,-52.959 R11.2@52.161,-54.52 C11.2@52.161,-52.972 51.605,-52.416 51.298,-52.416 51.067,-52.185 51.067,-50.759 51.298,-50.529 52.669,-50.529 L1.2@56.123,-47.074 58.595,-44.602 65.659,-44.602 67.968,-42.293 74.193,-42.293 ; C6.1@37.287,-42.712 36.271,-42.712 ; U1.5@41.658,-36.028 41.658,-37.108 39.852,-38.913 37.186,-38.913 36.271,-39.827 36.271,-42.712 ; U1.17@48.108,-30.378 49.555,-30.378 50.063,-29.87 C5.1@50.292,-29.87 50.292,-29.864 51.314,-28.842 53.461,-28.842 59.494,-34.874 64.821,-34.874 ; P2.9@63.17,-39.929 P2.10@63.17,-37.389 64.148,-36.411 66.358,-36.411 ; 67.833,-1.397 70.696,-1.397 70.824,-1.269 71.772,-1.269 71.899,-1.397 78.78,-1.397 78.907,-1.269 79.855,-1.269 79.982,-1.397 83.058,-1.397 83.363,-1.702 83.363,-4.281 85.559,-6.478 87.872,-6.478 88.519,-7.125 88.519,-17.424 86.614,-19.329 67.628,-19.329 64.821,-22.137 64.821,-34.874 ; 68.754,-2.112 69.342,-1.524 ; 69.135,-2.794 69.135,-7.426 Q3.3@72.679,-7.426 ; Q2.3@77.131,-7.29 80.747,-7.29 ; P6.3@79.765,-37.694 78.461,-38.998 78.461,-41.453 77.62,-42.293 74.193,-42.293 ; 80.772,-1.422 80.772,-7.264 81.509,-6.528 81.509,-8.128 ; 64.821,-34.874 66.358,-36.411 ; 66.358,-36.411 67.081,-37.134 73.329,-37.134 74.193,-37.998 74.193,-42.293
  Bottom Layer w0.254: v1(22.597,-33.624) 23.435,-34.462 23.435,-35.935 v1@24.172,-36.672 ; v1(22.597,-21.533) 23.435,-22.371 23.435,-23.845 v1@24.172,-24.581 ; v1(22.911,-45.72) 24.045,-46.854 v1(24.045,-48.762) ; v1(23.165,-18.39) v1(26.314,-18.39) ; v1@24.108,-48.699 v1@24.172,-48.762 ; v1(41.742,-15.392) 42.113,-15.392 v1(44.704,-17.983)
+24V: "P3_Heated Bed.3" "P3_Hot End.3" C9.2 C13_stepper1.2 C13_stepper2.2 C13_stepper3.2 C13_stepper4.2 D5.2 F1.2 FB1.2 P6.1 P11.5 P11.6 R14.2 U4_stepper1.4 U4_stepper1.11 U4_stepper2.4 U4_stepper2.11 U4_stepper3.4 U4_stepper3.11 U4_stepper4.4 U4_stepper4.11 | length 475.8
  Top Layer w0.203: 5.893,-41.859 6.096,-41.859
  Top Layer w0.254: 6.02,-17.729 6.071,-17.729 6.375,-17.424 16.542,-17.424 16.707,-17.59 16.887,-17.59 17.447,-17.59 C13_stepper2.2@18.673,-18.815 ; 6.045,-29.87 7.442,-29.87 7.695,-29.618 17.248,-29.618 18.749,-31.119 C13_stepper3.2@18.749,-31.236 ; 6.096,-41.859 6.247,-41.708 17.513,-41.708 18.725,-42.92
  Top Layer w0.381: 5.496,-5.75 10.611,-0.635 19.837,-0.635 ; 6.096,-41.859 6.071,-41.885 5.918,-41.885 ; 6.247,-41.708 6.595,-41.36 6.595,-39.149 7.559,-38.185 U4_stepper3.11@8.571,-38.185 ; U4_stepper4.11@8.571,-50.275 7.559,-50.275 6.595,-51.239 6.595,-53.425 6.274,-53.746 4.902,-53.746 ; U4_stepper4.4@8.571,-45.725 7.254,-45.725 6.341,-44.812 6.341,-42.307 5.918,-41.885 ; U4_stepper3.4@8.571,-33.635 7.254,-33.635 6.341,-32.721 6.341,-30.166 6.045,-29.87 5.969,-29.794 2.398,-29.794 0.727,-31.465 0.727,-40.151 2.461,-41.885 5.918,-41.885 ; U4_stepper2.11@8.571,-26.094 7.559,-26.094 6.595,-27.058 6.595,-29.321 6.172,-29.743 2.41,-29.743 0.727,-28.06 0.727,-19.375 2.372,-17.729 2.486,-17.729 ; U4_stepper2.4@8.571,-21.544 7.254,-21.544 6.341,-20.631 6.341,-18.05 6.045,-17.755 ; U4_stepper1.11@8.571,-14.004 7.559,-14.004 6.595,-14.968 6.595,-17.205 6.071,-17.729 6.045,-17.755 ; U4_stepper1.4@8.571,-9.454 7.254,-9.454 6.341,-8.54 6.341,-6.595 5.64,-5.894 5.621,-5.894 5.455,-5.728 4.603,-5.728 4.437,-5.894 2.117,-5.894 0.727,-7.285 0.727,-15.97 2.486,-17.729 ; C13_stepper1.2@18.673,-6.649 18.673,-1.799 19.92,-0.552 50.273,-0.552 ; 18.725,-42.92 18.725,-42.913 ; C13_stepper3.2@18.725,-30.83 C13_stepper3.2@18.725,-30.823 ; C13_stepper2.2@18.725,-18.739 C13_stepper2.2@18.725,-18.732 ; C13_stepper1.2@18.725,-6.649 C13_stepper1.2@18.725,-6.642 ; C9.2@45.745,-57.285 45.847,-57.387 45.847,-59.131 ; 50.273,-2.33 50.273,-0.635 61.5,-0.635 ; 61.5,-2.33 61.5,-0.635 ; D5.2@65.282,-47.955 67.386,-47.955 68.482,-46.859 F1.2@68.482,-43.79 F1.2@73.482,-43.79 ; D5.2@65.282,-47.346 66.697,-48.76 66.697,-52.621 ; R14.2@82.063,-40.234 P6.1@79.765,-40.234 79.765,-41.554 79.469,-41.851 ; 2.486,-17.729 6.02,-17.729 6.045,-17.755 ; 4.902,-53.746 5.029,-53.873 5.029,-54.407 9.754,-59.131 45.847,-59.131 ; 4.902,-53.746 2.232,-53.746 0.727,-52.241 0.727,-43.556 2.423,-41.859 5.893,-41.859 5.918,-41.885 ; 45.847,-59.131 72.873,-59.131 74.701,-57.302 80.493,-57.302 80.493,-53.543 79.375,-52.426 79.375,-48.348 74.816,-43.79 F1.2@73.482,-43.79 ; 61.5,-0.635 83.388,-0.635 83.947,-1.194 83.947,-4.039 85.801,-5.894 88.113,-5.894 89.179,-6.96 89.179,-17.59 86.856,-19.914 68.174,-19.914 65.405,-22.682 65.405,-34.246 67.709,-36.55 88.594,-36.55 88.824,-36.779 88.824,-41.335 88.308,-41.851 79.469,-41.851 ; F1.2@73.482,-43.79 74.394,-42.877 78.442,-42.877 79.469,-41.851
DIR1: U1.40 U4_stepper2.20 | length 29.3
  Top Layer w0.254: U4_stepper2.20@14.271,-24.794 15.348,-24.794 16.704,-23.438 24.267,-23.438 25.01,-24.181 25.01,-30.407 25.781,-31.178 U1.40@36.178,-31.178
DIR2: U1.42 U4_stepper3.20 | length 24.8
  Top Layer w0.254: U4_stepper3.20@14.271,-36.885 15.348,-36.885 16.704,-35.529 24.68,-35.529 25.179,-36.028 25.911,-36.028 29.122,-32.817 36.456,-32.817 36.613,-32.973 U1.42@36.808,-32.778
DIR3: U1.44 U4_stepper4.20 | length 32.3
  Top Layer w0.254: U4_stepper4.20@14.271,-48.975 15.348,-48.975 16.704,-47.619 24.111,-47.619 25.197,-46.533 25.197,-40.234 31.052,-34.378 U1.44@36.808,-34.378
EXP1: P2.3 U1.11 | length 10.7
  Top Layer w0.254: U1.11@46.458,-36.028 48.819,-36.028 51.373,-38.583 53.631,-38.583 54.977,-39.929 P2.3@55.55,-39.929
EXP2: P2.4 U1.12 | length 8.7
  Top Layer w0.254: U1.12@48.108,-34.378 48.539,-34.378 49.873,-35.712 53.873,-35.712 P2.4@55.55,-37.389
EXP3: P2.5 U1.13 | length 13.7
  Top Layer w0.254: U1.13@48.108,-33.578 53.543,-33.578 56.82,-36.855 56.82,-38.659 P2.5@58.09,-39.929
EXP4: P2.6 U1.14 | length 12.1
  Top Layer w0.254: U1.14@48.108,-32.778 53.835,-32.778 58.09,-37.033 P2.6@58.09,-37.389
EXP5: P2.7 U1.15 | length 16.7
  Top Layer w0.254: U1.15@48.108,-31.978 54.207,-31.978 59.17,-36.941 59.17,-38.469 P2.7@60.63,-39.929
EXP6: P2.8 U1.16 | length 14.8
  Top Layer w0.254: U1.16@48.412,-31.204 54.445,-31.204 P2.8@60.63,-37.389